# Altium PCB 002-0081 Rev -.PcbDoc
Units mil, origin at the board's own origin, x right, y up, seen from the top; angles counter-clockwise.
Board outline 2210 x 2530 mil, 4 copper layers (Top Layer, Layer 1, Layer 2, Bottom Layer), stack 23.756 mil thick; 66 components, 35 nets, 183 pads, 51 vias.
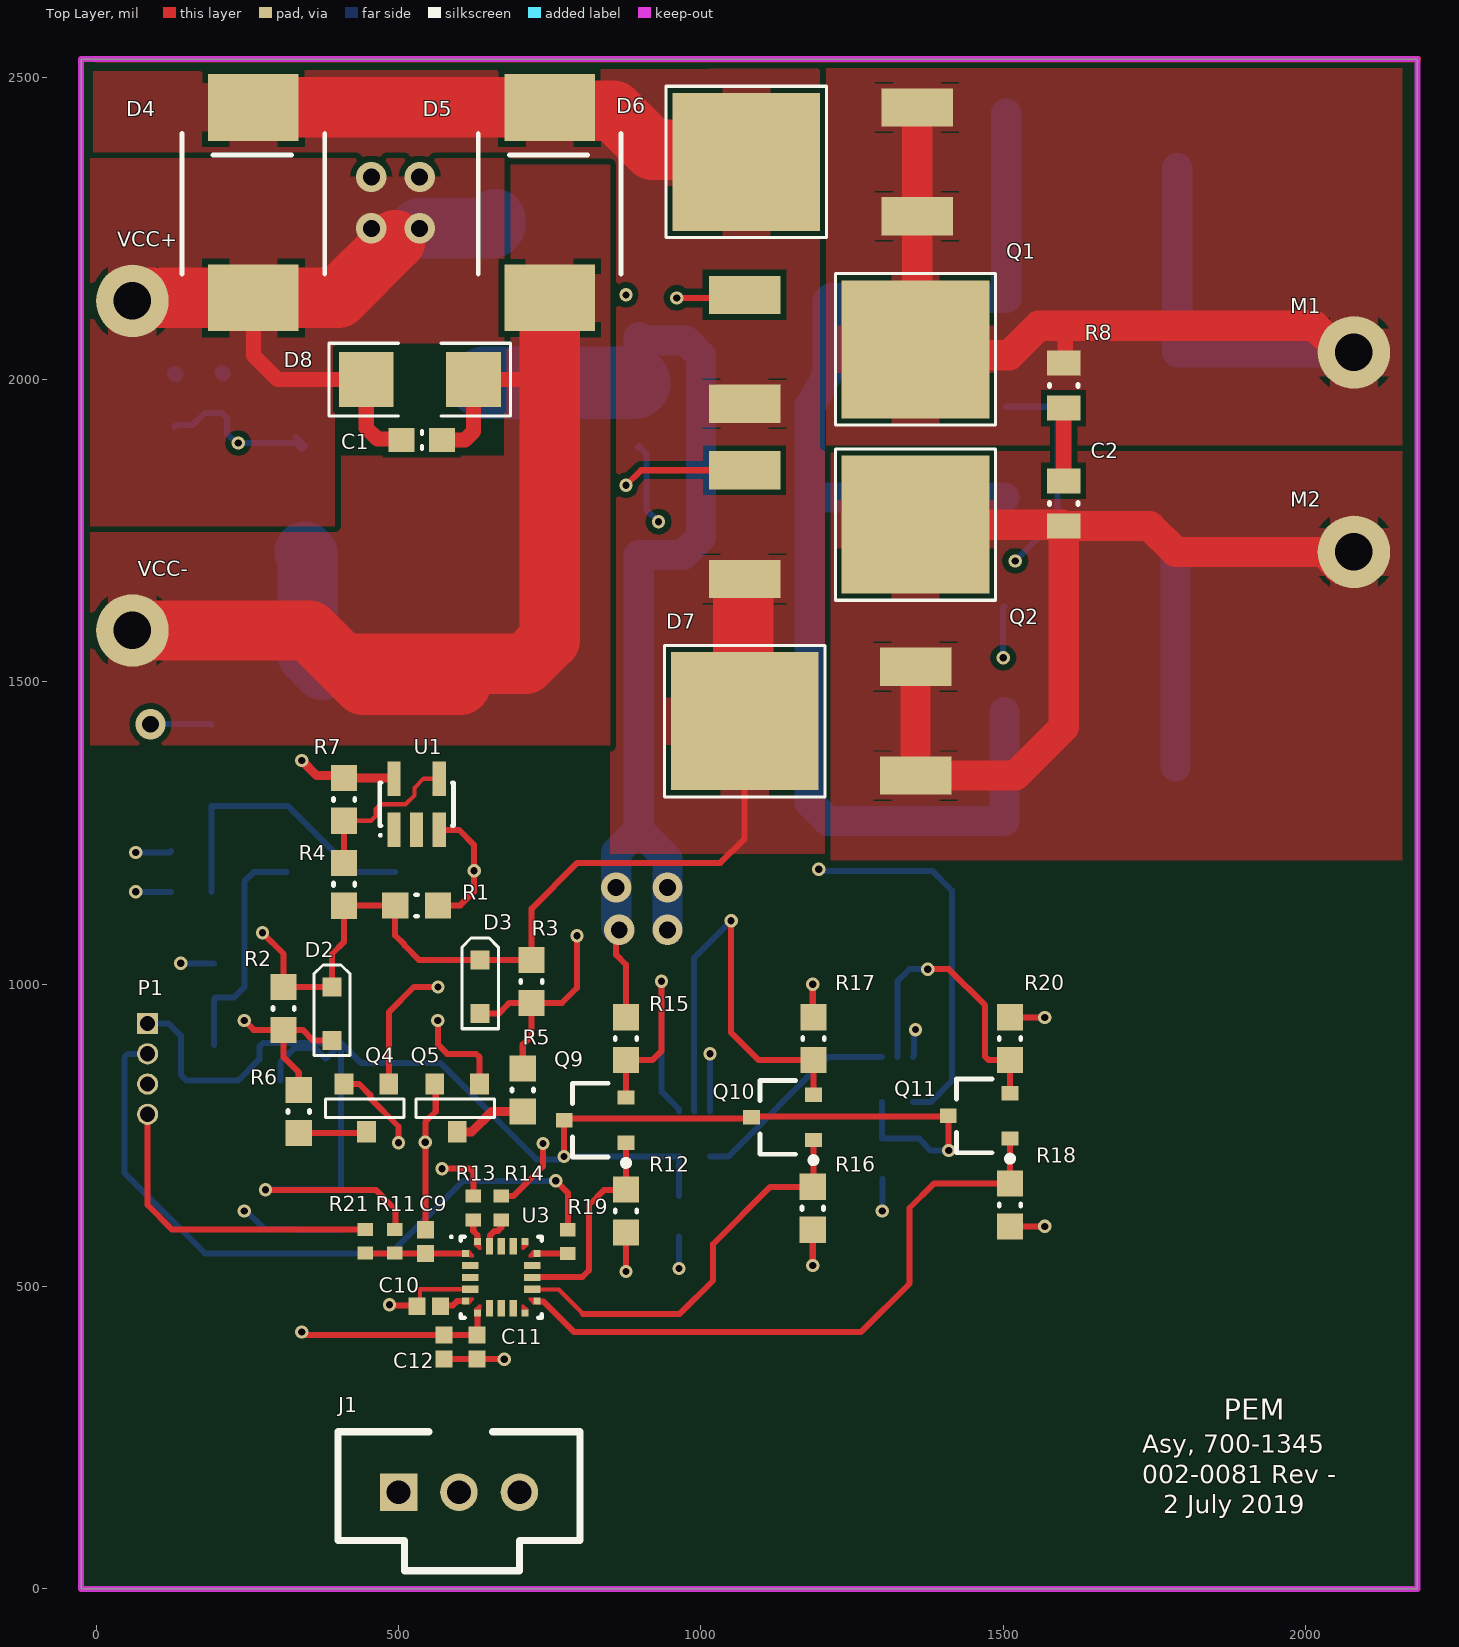
[diagram p0: Top Layer view]
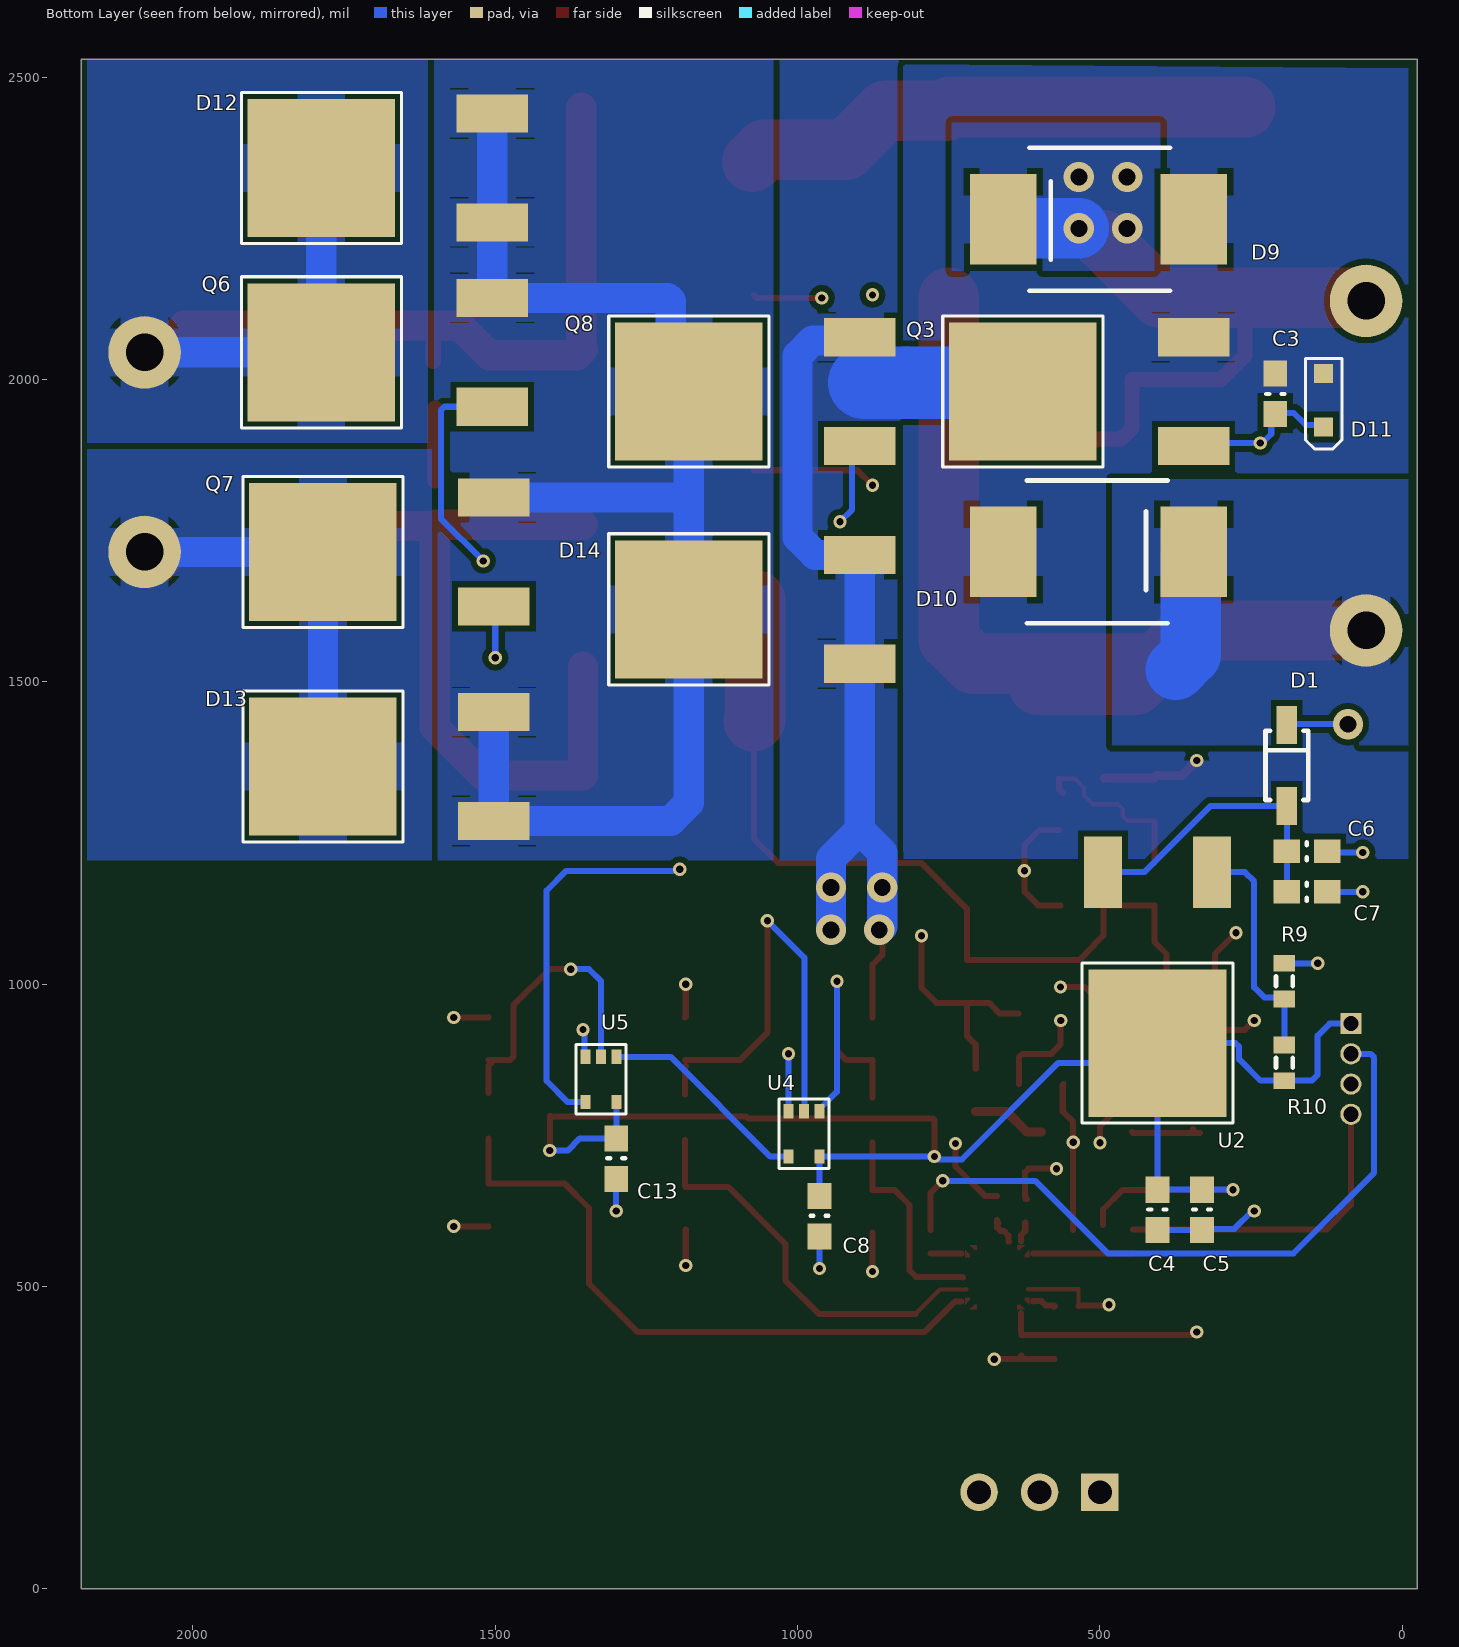
[diagram p1: Bottom Layer view, seen from below]
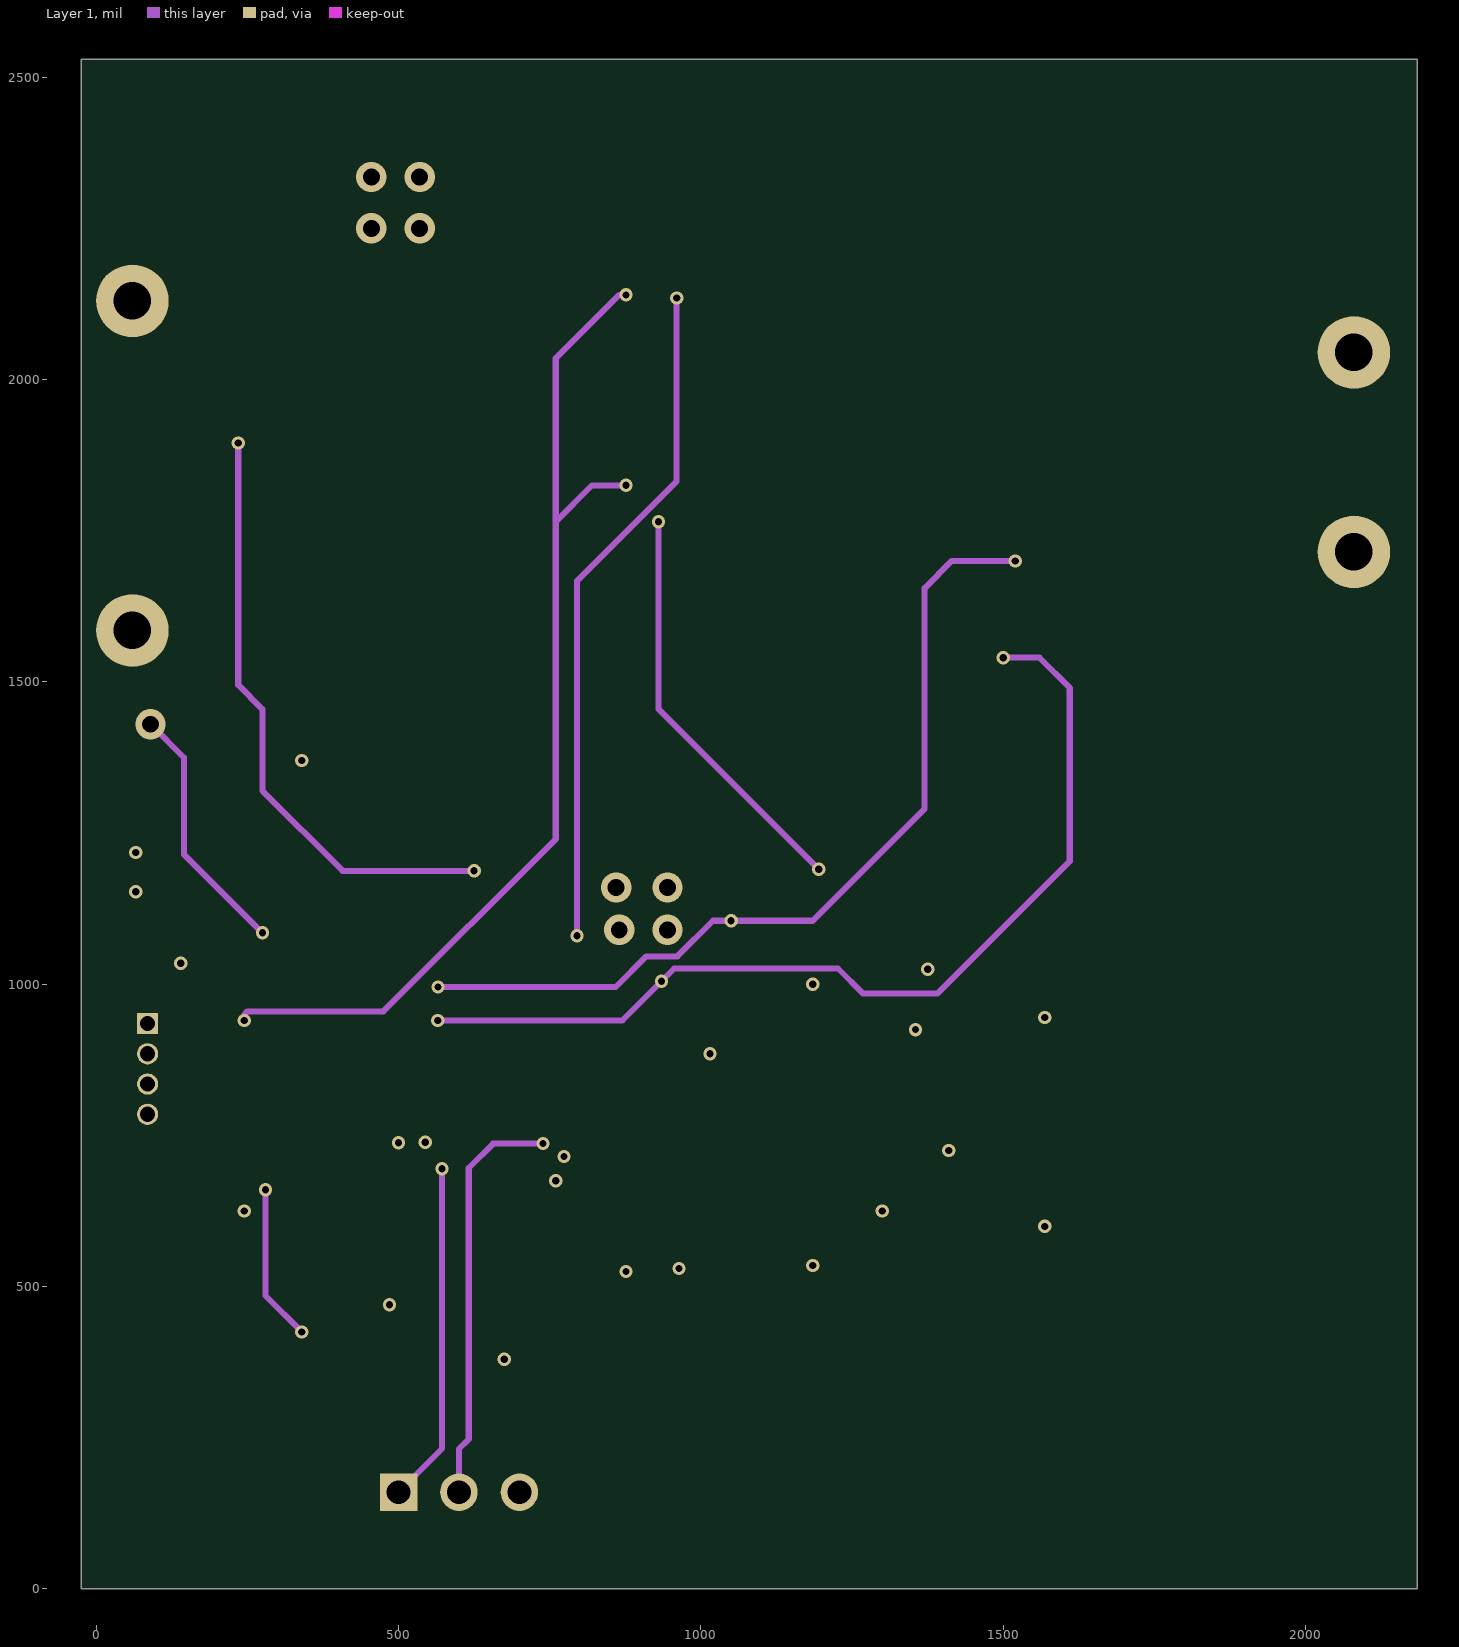
[diagram p2: Layer 1]
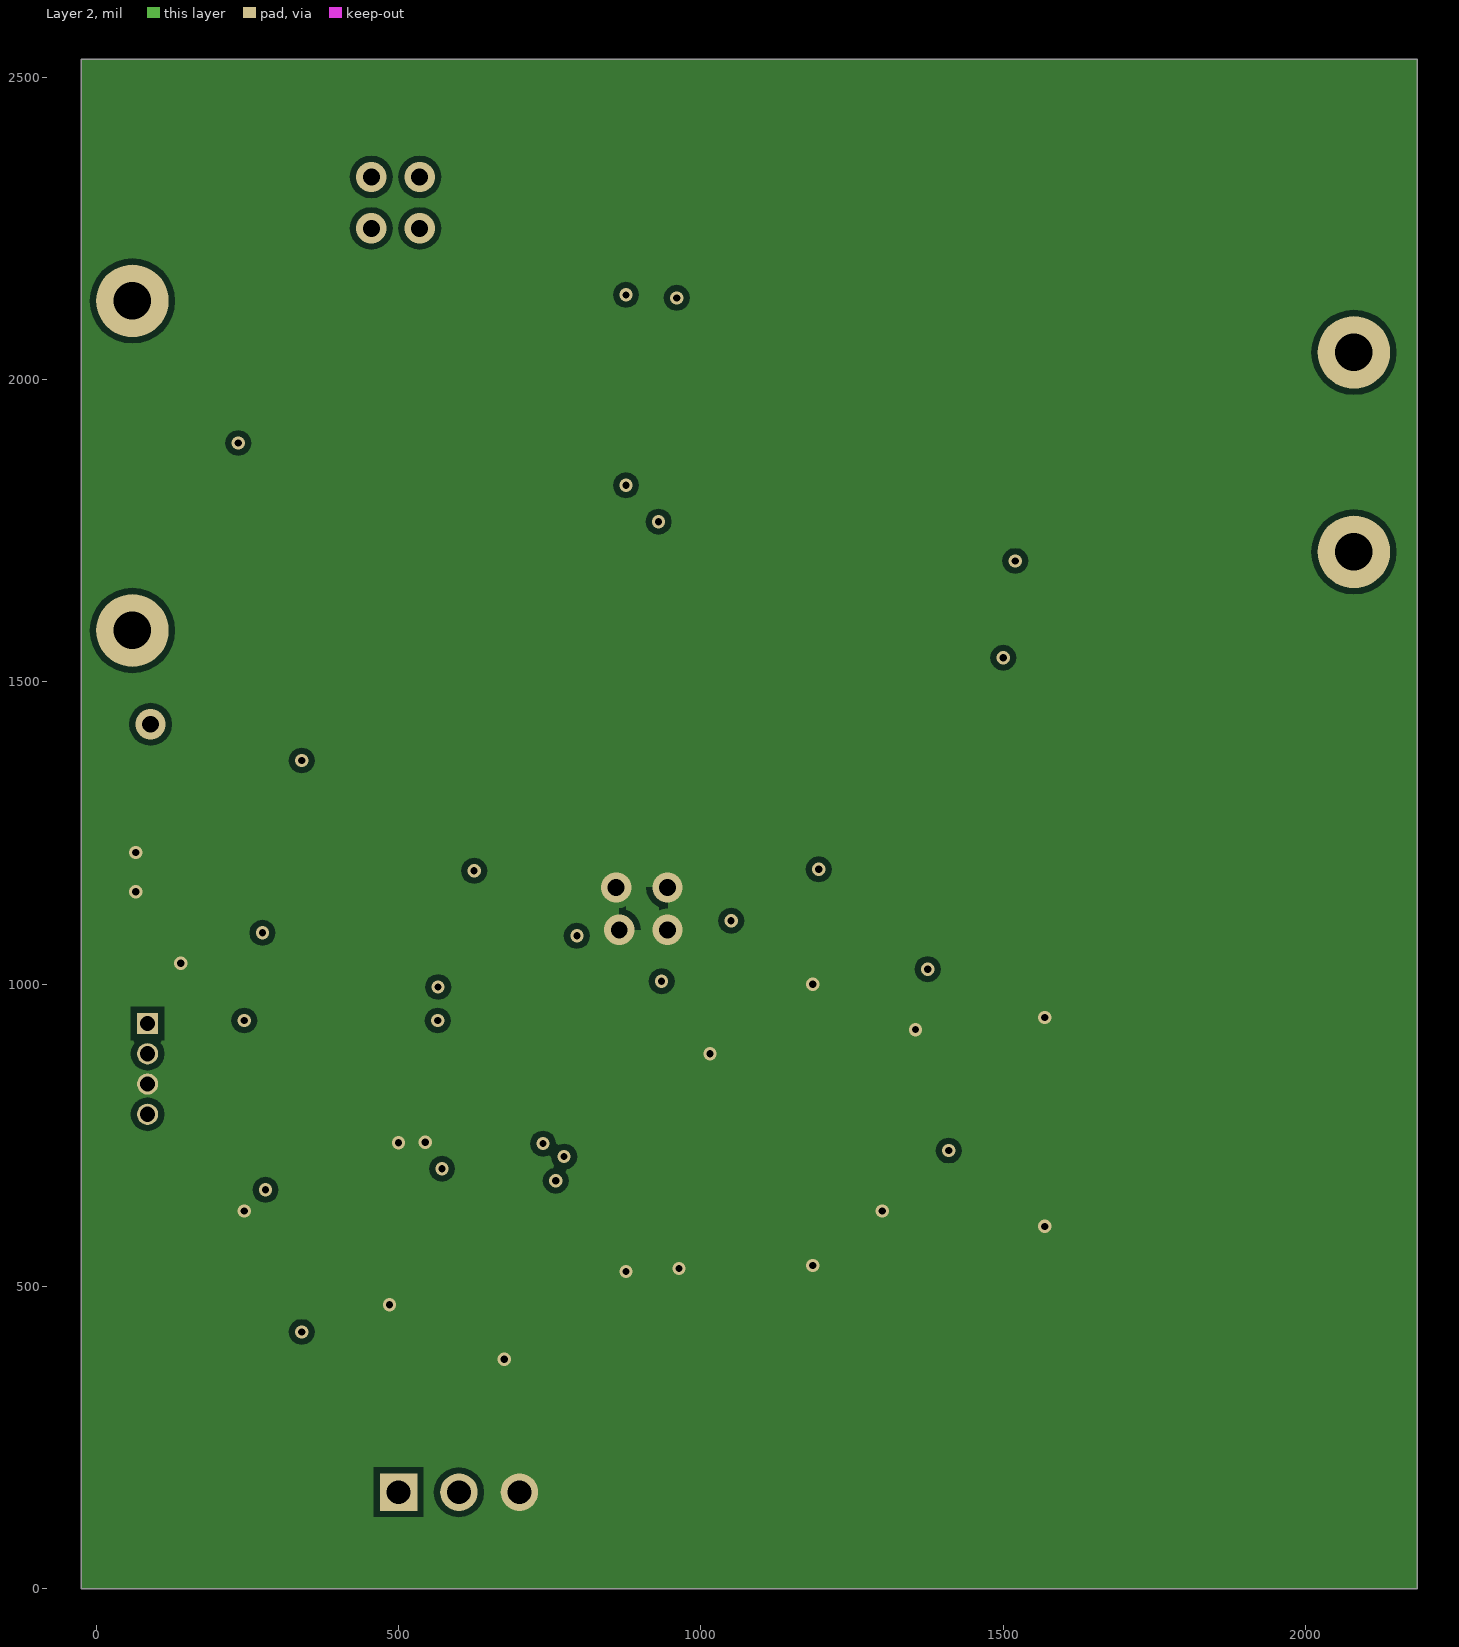
[diagram p3: Layer 2]

## Layer stack, top to bottom
Top Solder: solder mask 0.4, Solder Resist, Dk 3.5
Top Layer: signal copper 1.4
Dielectric 2: prepreg 2.8, PP-006, Dk 4.1
Layer 1: signal copper 1.3779
Dielectric 1: dielectric 12.6, FR-4, Dk 4.8
Layer 2: signal copper 1.3779
Dielectric 3: prepreg 2.8, PP-006, Dk 4.1
Bottom Layer: signal copper 1.4
Bottom Solder: solder mask 0.4, Solder Resist, Dk 3.5

## Board outline
-25,0 -25,2530 2185,2530 2185,0

## Design rules (kind name [scope] priority, off if disabled: settings)
Clearance Clearance_3 [HasFootprint('UFQFPN20_V')] p1: gap=7 ignorepadtopadclearanceinfootprint=TRUE except(0: Arc-Poly Arc-Region Track-Poly Track-Region SMDPad-Poly SMDPad-Region THPad-Poly THPad-Region Via-Poly Via-Region Fill-Poly Fill-Region Poly-Poly Poly-Region Region-Region)
Clearance Clearance_2 [HasFootprint('SOT-353')] p2: gap=10 ignorepadtopadclearanceinfootprint=TRUE except(0: Arc-Hole Track-Hole SMDPad-Hole THPad-Hole Via-Hole Fill-Hole Poly-Hole Region-Hole Text-Hole)
Clearance [All] p3: gap=10 ignorepadtopadclearanceinfootprint=FALSE except(0: Arc-Hole Track-Hole SMDPad-Hole THPad-Hole Via-Hole Fill-Hole Poly-Hole Region-Hole Text-Hole)
PolygonConnect [All] p1: connectstyle=Relief reliefconductorwidth=80 reliefentries=4 polygonreliefangle="90 Angle" airgapwidth=10
RoutingVias [All] p1: holewidth=28 width=50 viastyle="Through Hole" minholewidth=12 minwidth=22 maxholewidth=28 maxwidth=50
SilkToSolderMaskClearance [IsPad] p1: minsilkscreentomaskgap=7 clearancetoexposedcopper=TRUE
SolderMaskExpansion [All] p1: expansion=4
Width [All] p1: maxlimit=120 minlimit=7 preferedwidth=10
29 further rules are at their usual default settings.

## Classes and differential pairs
component class "002-0081 Rev -": C1 C2 C3 C4 C5 C8 C10 C13 D1 D2 D3 D6 D11 D12 D13 D14 J1 P1 Q1 Q2 Q3 Q4 Q5 Q6 Q9 R1 R2 R3 R4 R5 R6 R7 R8 R9 R10 R11 R12 R13 R14 R15 R16 R17 R18 R19 R20 R21 U1 U2 U3 U5

## Components (designator, comment, footprint, x,y, rotation, side; value= is the part's Value field where it differs from the comment)
C1 "0.01 UF, 50V" 0603 505,1900 r0 top
C2 "Cap" RESC0805(2012)_N 1600,1795 r90 top value="0.1uF 100V"
C3 "Cap" 0603 210,2010 r270 bottom value="1000pF 50V"
C4 "Cap" 0603 405,593.39 r90 bottom value="0.1uF 50V"
C5 "Cap" 0603 331.34,593.39 r90 bottom value="1uF 50V"
C6 "Cap" 0603 124.1,1220 r0 bottom value="22UF 6.3V"
C7 "Cap" 0603 124.1,1152.87 r0 bottom value="0.1uF 50V"
C8 "Cap" 0603 963.82,583.07 r90 bottom value="0.1uF, 50V"
C9 "Cap" CAPC0402(1005)60_M 544.41,574.37 r270 top value=0.1uF
C10 "Cap" CAPC0402(1005)60_M 550,467.56 r0 top value=0.68uF
C11 "Cap" CAPC0402(1005)60_M 630,400 r90 top value=0.1uF
C12 "Cap" CAPC0402(1005)60_M 575,400 r90 top value=1uF
C13 "Cap" 0603 1300,678.07 r90 bottom value="0.1uF, 50V"
D1 "MBR0540" SOD123/X.85 191.03,1361.93 r90 bottom
D2 "MM3Z8V2B" SOD-323F 390,906.85 r90 top
D3 "MM3Z8V2B" SOD-323F 635,951.42 r90 top
D4 "SK1545-TP" SMC 260,2135.04 r90 top
D5 "SK1545-TP" SMC 750,2135.04 r90 top
D6 "V20PW10-M3/I" "DPAK (TO-252-3)"#1 1357.68,2270 r90 top
D7 "V20PW10-M3/I" "DPAK (TO-252-3)"#1 1355,1345 r90 top
D8 "TVS DIODE 28VWM 45.4VC SMB" "SMB - Bidirection" 535.32,2000 r180 top
D9 "SK1545-TP" SMC 345,2265 r0 bottom
D10 "SK1545-TP" SMC 659.96,1715 r180 bottom
D11 "MM3Z8V2B" SOD-323F 130,2010 r270 bottom
D12 "V20PW10-M3/I" "DPAK (TO-252-3)"#1 1505,2260 r90 bottom
D13 "V20PW10-M3/I" "DPAK (TO-252-3)"#1 1502.32,1270 r90 bottom
D14 "V20PW10-M3/I" "DPAK (TO-252-3)"#1 897.32,1530 r90 bottom
J1 "RS232 Conn" SCON3/.10 500,160 r180 top
P1 "4 Pin Connector" "4 PIN IN-LINE" 85,935 r0 top
Q1 "AOD4189" "DPAK (TO-252-3)"#2 1072.32,2140 r270 top
Q2 "AOD4189" "DPAK (TO-252-3)"#2 1072.32,1850 r270 top
Q3 "AOD454A" "DPAK (TO-252-3)"#2 345,1890 r90 bottom
Q4 "2N7002K-7" SOT-23-3 484,835 r180 top
Q5 "2N7002K-7" SOT-23-3 634,835 r180 top
Q6 "AOD454A" "DPAK (TO-252-3)"#2 1505,1955 r90 bottom
Q7 "AOD454A" "DPAK (TO-252-3)"#2 1502.32,1625 r90 bottom
Q8 "AOD454A" "DPAK (TO-252-3)"#2 897.32,1890 r90 bottom
Q9 "SSM3K329R" SOT-23F 825,775.32 r180 top
Q10 "SSM3K329R" SOT-23F 1135,780 r180 top
Q11 "SSM3K329R" SOT-23F 1460,782.4 r180 top
R1 "Res3" RESC0603(1608)_M 530,1130.32 r180 top value=1K
R2 "Res1" RESC0603(1608)_M 310,960 r270 top value=10K
R3 "Res1" RESC0603(1608)_M 720,1004.57 r270 top value=10K
R4 "Res1" RESC0603(1608)_M 410,1165.32 r90 top value=100K
R5 "Res1" RESC0603(1608)_M 705.43,825 r90 top value=1K
R6 "Res1" RESC0603(1608)_M 335,789.57 r270 top value=1K
R7 "Res1" RESC0603(1608)_M 410,1305.75 r90 top value=3.3K
R8 "Res1" RESC0805(2012)_N 1600,1990 r90 top value="49.9 Ohm"
R9 "Res3" J1-0603 195,1005 r270 bottom value=10K
R10 "Res3" J1-0603 195,870 r270 bottom value=3.3K
R11 "Res1" RESC0402(1005)_N 494.13,575 r90 top value=1k
R12 "Res1" RESC0603(1608)_M 876.18,625 r270 top value=10K
R13 "Res1" RESC0402(1005)_N 623.58,630 r90 top value=221
R14 "Res1" RESC0402(1005)_N 670,630 r90 top value=221
R15 "Res1" RESC0603(1608)_M 876.18,910 r90 top value=10K
R16 "Res1" RESC0603(1608)_M 1185,629.57 r270 top value=10K
R17 "Res1" RESC0603(1608)_M 1186.18,910 r90 top value=10K
R18 "Res1" RESC0603(1608)_M 1511.18,635 r270 top value=10K
R19 "Res1" RESC0402(1005)_N 780,574.37 r90 top value=100
R20 "Res1" RESC0603(1608)_M 1511.18,910 r90 top value=10K
R21 "Res1" RESC0402(1005)_N 445,575 r90 top value=100
U1 "LMV431ACM5/NOPB" DBV005 492.6,1255.32 r0 top
U2 "LM317MDTXM" "DPAK (TO-252-3)"#2 315,1185.32 r0 bottom
U3 "STM8S003F3_1" UFQFPN20_V 670,515.32 r0 top
U4 "74AHC1G86SE-7" SOT-353 1015,715 r180 bottom
U5 "74AHCT1G08SE-7" SOT-353 1350.59,805.2 r180 bottom

## Footprints (in the part's own frame and the unit in brackets; to place one, negate y for a bottom-side part, rotate by r counter-clockwise, add the part's x,y. Pads: shape width x height; smd on the part's side, far side on the other; paste and mask are expansions set on the pad)
"4 PIN IN-LINE" [mil]
  rect 35x35 hole 25: 1(0,0)
  round 35 hole 25: 2(0,-50) 3(0,-100) 4(0,-150)
0603 [mm] "1.6 x .81 0603 with position tab for component rotation reference"
  rect 1.1x1 smd: 1(0,0) 2(1.7,0)
  silkscreen extent 0.86,-0.38 0.86,0.38
CAPC0402(1005)60_M [mm] "Chip Capacitor, Body 1.0x0.5mm, Height 0.6mm, IPC Low Density"
  rect 0.72x0.72 smd: 1(-0.5,0) 2(0.5,0)
  body extent -0.55,-0.3 0.55,0.3, height 0.6
DBV005 [mm]
  rect 0.55x1.45 smd: 1(0,0) 2(0.95,0) 3(1.9,0) 4(1.9,2.15) 5(0,2.15)
  silkscreen extent -0.62,-0.27 2.5,1.97
"DPAK (TO-252-3)"#1 [mm]
  rect 1.6x3 smd: 1(0,0) 1(4.572,0)
  rect 5.8x6.2 smd: 2(2.286,7.18)
  silkscreen extent -0.89,3.81 5.46,10.54
"DPAK (TO-252-3)"#2 [mm]
  rect 1.6x3 smd: 1(0,0) 3(4.572,0)
  rect 5.8x6.2 smd: 2(2.286,7.18)
  silkscreen extent -0.89,3.81 5.46,10.54
J1-0603 [mm] "Chip Resistor, Body 1.6x0.8mm, IPC High Density"
  rect 0.7x0.9 smd: 1(-0.75,0) 2(0.75,0)
  silkscreen extent -0.2,-0.35 0.2,0.35, body extent -0.85,-0.48 0.85,0.48, height 0.9
RESC0402(1005)_N [mm] "Chip Resistor, Body 1.0x0.5mm, IPC Medium Density"
  rect 0.55x0.65 smd: 1(-0.5,0) 2(0.5,0)
  body extent -0.52,-0.27 0.53,0.28, height 0.4
RESC0603(1608)_M [mm] "Chip Resistor, Body 1.6x0.8mm, IPC Low Density"
  rect 1.1x1.1 smd: 1(-0.9,0) 2(0.9,0)
  silkscreen extent -0.05,-0.45 0.05,0.45, body extent -0.85,-0.47 0.85,0.47, height 0.6
RESC0805(2012)_N [mm] "Chip Resistor, Body 2.0x1.3mm, IPC Medium Density"
  rect 1.05x1.4 smd: 1(-0.95,0) 2(0.95,0)
  silkscreen extent -0.05,-0.6 0.05,0.6, body extent -1.1,-0.67 1.1,0.68, height 0.7
SCON3/.10 [mil]
  rect 62x62 hole 39.37: 1(0,0)
  round 62 hole 39.37: 2(-100,0) 3(-200,0)
  silkscreen extent -300,-100 100,130
"SMB - Bidirection" [mm] "DO-214-AA/SMB; 2 C-Bend Leads; Body 5.3 x 3.6 mm, inc. leads (LxW)"
  rect 2.3x2.3 smd: 1(-2.25,0) 2(2.25,0)
  silkscreen extent -3.81,-1.52 3.81,1.52
SMC [mm] "SMC; Case 403 Body 6.8 x 5.8 mm (LxW)"
  rect 2.8x3.8 smd: 1(0,0) 2(8,0)
  silkscreen extent 1,-3 6.9,3
SOD123/X.85 [mm]
  rect 1.6x0.85 smd: 1(-1.7,0) 2(1.7,0)
  silkscreen extent -1.45,-0.9 1.45,0.9
SOD-323F [mm]
  rect 0.8x0.8 smd: 1(0,0) 2(2.25,0)
  silkscreen extent -0.64,-0.76 3.17,0.76
SOT-23-3 [mil]
  rect 31x35 smd: 1(0,0) 2(74,0) 3(37,79)
  silkscreen extent -25,25 105,55
SOT-23F [mm] "SOT23, 3-Leads, Body 2.90x2.40mm, Pitch 0.95mm, IPC Medium Density"
  rect 0.7x0.6 smd: 1(-1.3,0.95) 2(1.3,0) 3(-1.3,-0.95)
  silkscreen extent -1.43,-1.55 0.95,1.92, body extent -1.32,-1.55 1.32,1.55, height 0.97
SOT-353 [mm]
  rect 0.42x0.6 smd: 1(1.3,1.9) 2(0.65,1.9) 3(0,1.9) 4(0,0) 5(1.3,0)
  silkscreen extent -0.41,-0.51 1.7,2.41
UFQFPN20_V [mm] "QFN, 20-Leads, Body 3x3mm, Pitch 0.5mm, ST Recommended"
  rect 0.3x0.3 smd paste+0 mask-0.15: 1(-1.5,1) 5(-1.5,-1) 6(-1,-1.5) 10(1,-1.5) 11(1.5,-1) 15(1.5,1) 16(1,1.5) 20(-1,1.5)
  rect 0.7x0.3 smd paste+0 mask+0.06: 2(-1.3,0.5) 3(-1.3,0) 4(-1.3,-0.5) 12(1.3,-0.5) 13(1.3,0) 14(1.3,0.5)
  rect 0.3x0.7 smd paste+0 mask+0.06: 7(-0.5,-1.3) 8(0,-1.3) 9(0.5,-1.3) 17(0.5,1.3) 18(0,1.3) 19(-0.5,1.3)
  Top Layer region: 0.85,1.15 0.85,1.35 1.15,1.35 0.95,1.15
  Top Layer region: -0.85,1.15 -0.85,1.35 -1.15,1.35 -0.95,1.15
  Top Layer region: 1.15,0.85 1.35,0.85 1.35,1.15 1.15,0.95
  Top Layer region: 0.85,-1.15 0.85,-1.35 1.15,-1.35 0.95,-1.15
  Top Layer region: -1.15,-0.85 -1.35,-0.85 -1.35,-1.15 -1.15,-0.95
  Top Layer region: 1.15,-0.85 1.35,-0.85 1.35,-1.15 1.15,-0.95
  Top Layer region: -0.85,-1.15 -0.85,-1.35 -1.15,-1.35 -0.95,-1.15
  Top Layer region: -1.15,0.85 -1.35,0.85 -1.35,1.15 -1.15,0.95
  silkscreen extent -2.15,-1.7 1.7,1.75, body extent -1.55,-1.55 1.55,1.55, height 0.6

## Part data
C1: library part CAP, "Cap Cer .01uf 50V 0603 RoHS", Manufacturer="Garrett Electronics Corporation", Part Number=X7R0603HTTD103K, PEM Part Number=EE-1293
C2: "Cap Cer 0.1uF 100V 10% X7R 0805", Part Number=CL21B104KCFSFNE, PEM Part Number=EE-1659
C3: "CAP Cer, 0.1uF, 50V, 0603 X7R, 10%", Manufacturer Part Number=06035C104KAT2A, PEM Part Number=EE-1343
C4 C7: "CAP Cer, 0.1uF, 50V, 0603 X7R, 10%", Manufacturer Part Number=06035C104KAT2A, PEM Part Number=EE-1425
C5: "CAP CER 1UF 50V 10% X5R 0603", Manufacturer Part Number=06035C104KAT2A, PEM Part Number=EE-1708
C6: "CAP CER 22UF 6.3V X5R 0603", Manufacturer Part Number=06035C104KAT2A, PEM Part Number=EE-1981
C8: "CAP Cer, 0.1uF, 50V, 0603 X7R, 10%", Part Number=06035C104KAT2A, PEM Part Number=EE-1425
C9 C11: "Cap Cer 0.1uF 10V 10% X5R 0402", Manufacturer="Taiyo Yuden", Part Number=LMK105BJ104KV-F, PEM Part Number=EE-1661
C10: "Cap cer 0.68uF 6.3V 5% X6S 0402", Manufacturer="Samsung Electro-Mechanics", Part Number=CL05X684JQ5NNNC, PEM Part Number=EE-1673
C12: "Cap Cer 1uF 10V 10% X5R 0402", Manufacturer="TDK Corporation", Part Number=C1005X5R1V105M050BC, PEM Part Number=EE-1725
C13: "Cap Cer 0.1uF 10V 10% X5R 0402", Part Number=06035C104KAT2A, PEM Part Number=EE-1425
D1: library part "D Schottky", "Diode Schottky 40V 500ma SOD-123", Manufacturer Part Number=MBR0540-TP, PEM Part Number=EE-1290
D2 D3 D11: library part "D Zener", "DIODE ZENER 8.2V 200MW SOD323F", PEM Part Number=EE-1681, Manufacturer Part Number=MM3Z8V2B
D4 D5 D9 D10: library part "D Schottky", "DIODE SCHOTTKY 45V 15A DO214AB", PEM Part Number=EE-2167, Part Number=SK1545-TP, Revision="July-2002: Re-released for DXP Platform."
D6 D7 D12 D13 D14: library part "D Schottky", "DIODE SCHOTTKY 100V 20A SLIMDPAK", PEM Part Number=EE-2166, Manufacturer Part Number=V20PW10-M3/I
D8: library part "Dual Zener", "TVS DIODE 100VWM 162VC DO214AA", Manufacturer="ON Semiconductor", Part Number=SMBJ100CA, PEM Part Number=EE-1946
J1: library part "Header 3", "CONN HDR VERT 3POS .100 TIN", Manufacturer="Phoenix Contact", Part Number=70543-0037, PEM Part Number=EE-1116, LatestRevisionDate=17-Jul-2002, LatestRevisionNote="Re-released for DXP Platform.", Publisher="Altium Limited"
P1: Manufacturer="Sullins Connector Solutions", Part Number=GRPB501VWVN-RC, PEM Part Number=EE-1855
Q1 Q2: library part MOSFET-P, "MOSFET P-CH 40V 40A TO252 DPAK", PEM Part Number=EE-1879, Manufacturer Part Number=AOD4189
Q3: library part MOSFET-N, "MOSFET N-CH 250V 16A D-PAK", PEM Part Number=EE-1898, Part Number=AOD454A
Q4 Q5: library part MOSFET-N, "MOSFET N-CH 60V 0.38A SOT23-3", PEM Part Number=EE-2053, Manufacturer Part Number=2N7002K-7
Q6 Q7 Q8: library part MOSFET-N, "MOSFET N-CH 40V 20A TO252", Manufacturer="Alpha & Omega Semiconductor Inc.", PEM Part Number=EE-1898, Part Number=AOD454A
Q9 Q10: library part MOSFET-N, "N-Channel 30V 3.5A (Ta) 1W (Ta) Surface Mount SOT-23F", Manufacturer="Alpha & Omega Semiconductor Inc.", PEM Part Number=EE-1830, Part Number=SSM3K329R
Q11: library part MOSFET-N, "N-Channel 30V 3.5A (Ta) 1W (Ta) Surface Mount SOT-23F", Manufacturer="Alpha & Omega Semiconductor Inc.", Part Number=AOD454A, PEM Part Number=EE-1898
R1: "RES SMD 1K OHM 1% 1/10W 0603", PEM Part Number=EE-2066, LatestRevisionDate=29-May-2009, LatestRevisionNote="IPC-7351 Footprint Added.", PackageDescription="Chip Resistor", PackageReference=J1-0603, Published=8-Jun-2000, Publisher="Altium Limited"
R2 R3 R9 R12 R15 R16 R17 R18 R20: "Res 10K 0603 1% 1/10W RoHS", Part Number=RK73H1JTTD1002F, PEM Part Number=EE-1296
R4: "Res 100K 0603 1% 1/10W RoHS", Part Number=RK73H1JTTD1002F, PEM Part Number=EE-1295
R5 R6: "Res 1.0K 0603 1% 1/10W RoHS", Manufacturer Part Number=CRCW06031K00FKEA, PEM Part Number=EE-1297
R7: "RES 23.7K OHM 1/10W 1% 0603 SMD", Part Number=MCR03ERTF3301, PEM Part Number=EE-1730
R8: "Res 49.9R 0805 1% 1/8W", Manufacturer=Phycomp, Part Number=9C08052A49R9FKHFT, PEM Part Number=EE-1238
R10: "Res 3.3K 0603 1% 1/8W RoHS", Part Number=MCR03ERTF3301, PEM Part Number=EE-1730
R11: "Res 1K 0402 1% 1/16W RoHS", Manufacturer=Vishay, Part Number=CRCW04021K00FKED, PEM Part Number=EE-1581
R13: "RES SMD 221 OHM 1% 1/16W 0402", Part Number=RC1005F2210CS, PEM Part Number=EE-1798
R14: "Res 1K 0603 1% 1/10W RoHS", Part Number=RC1005F2210CS, PEM Part Number=EE-1798
R19 R21: "Res 100R 0402 1% 1/16W RoHs", Manufacturer=Yageo, Part Number=RC0402FR-07100RL, PEM Part Number=EE-1588
U1: library part TL431IDBVR, "IC VREF SHUNT ADJ SOT23-5", PEM Part Number=EE-1900, Part Number=LMV431ACM5/NOPB
U2: library part LM317D2T(3), "SMT, IC, Adjust Voltage Reg, 0.5A, 3TERM, TO-252, 40V diff max", Manufacturer="Fairchild Semiconductor", PEM Part Number=EE-1248, Part Number=LM317MDTXM
U3: "MCU 8BIT 8KB 16MHZ 20-UFQFPN", Manufacturer=STMicroelectronics, Part Number=STM8S003F3U6TR, PEM Part Number=EE-1655
U4: library part NC7SZ08, "IC GATE XOR 1CH 2-INP SOT353", Manufacturer="Diodes Incorporated", PEM Part Number=EE-2165, Part Number=74AHC1G86SE-7
U5: library part NC7SZ08, "IC GATE AND 1CH 2-INP SOT-353", Manufacturer="Diodes Incorporated", PEM Part Number=EE-1801, Part Number=74AHCT1G08SE-7

## Free pads (board coordinates)
  round 120 hole 62: 1(2080,2045) 13(2080,1715) 14(60,2130) 15(60,1585)

## Via types
v1: diameter 22, hole 12, Top Layer to Bottom Layer, 42 vias
v2: diameter 50, hole 28, Top Layer to Bottom Layer, 9 vias

## Nets (pads, with @x,y where several pads share a name; then routed paths per layer and width w, separated by ;. In a path a pad name is that pad's centre, name@x,y a point inside that pad or via, vN(x,y) a via of type N, cw(c..) or ccw(c..) an arc to the next point about the centre after c; other vN are vias at no path point)
5V: C4.2 C5.2 C8.2 C11.2 C12.2 C13.2 P1.1 Q9.2 Q10.2 Q11.2 R10.2 R11.2 U2.2 U3.6 U4.5 U5.5 | length 3439.1
  Top Layer w10: v1(280,660) 462.51,660 495,627.51 R11.2@495,601.57 ; v1(340,425) 345.31,419.69 C12.2 C11.2 ; C11.2@630.32,425.32 630.32,455.95 U3.6 ; v1(773.82,715) Q9.2 776.16,777.66 1081.48,777.66 Q10.2 1085.02,781.2 1407.62,781.2 Q11.2 1409.41,781.81 1409.41,725.59 v1(1410,725)
  Layer 1 w10: v1(280,660) 280,485 v1(340,425)
  Bottom Layer w10: P1.1 120,935 140,915 140,850 149.53,840.47 R10.2 234.53,840.47 270,875.94 270,896.78 275.86,902.64 U2.2 ; v1(280,660) 290,660 290.32,660.32 C5.2 C4.2 U2.2 ; U2.2@305,840.47 305,871.57 328.43,895 361.57,895 379.47,877.1 U2.2 ; C8.2 U4.5 v1(773.82,715) 769.35,710.53 728.16,710.53 568.7,870 437.64,870 U2.2 ; U5.5 1299.41,745.59 C13.2 1360,745 1380,725 v1(1410,725)
12-24V: C6.2 C7.2 D1.1 U2.3 | length 491.5
  Bottom Layer w10: C7.2 C6.2 D1.1 317.08,1295 426.76,1185.32 U2.3
CCW_MCU: Q10.1 R16.1 U3.12 | length 680.9
  Top Layer w7: U3.12 721.81,495 765,495 805,455
  Top Layer w10: 805,455 965,455 1020,510 1020,570 1115,665 R16.1 1186.18,666.18 Q10.1
CCW_MOT: Q4.1 Q6.1 Q10.3 R17.1 U4.2 | length 2771.7
  Top Layer w10: Q4.1 484,954 525.43,995.43 v1(565.43,995.43) ; v1(1050,1105) 1050,920 1095,875 1185.75,875 R17.1 ; R17.1@1185,864.57 1186.18,863.39 Q10.3
  Layer 1 w10: v1(565.43,995.43) 859.18,995.43 909.74,1046 961,1046 1020,1105 v1(1050,1105) 1185,1105 1370,1290 1370,1655 1415,1700 v1(1520,1700)
  Bottom Layer w10: U4.2 989,790.21 989,1044 v1(1050,1105) ; Q6.1 1584.14,1955 1590,1949.14 1590,1770 v1(1520,1700)
CW_MCU: Q9.1 R12.1 U3.13 | length 350.6
  Top Layer w10: U3.13@726.4,515.32 727.31,516.22 804.19,516.22 815,527.03 815,635 840,660 875.75,660 R12.1 Q9.1
CW_MOT: Q5.1 Q7.1 Q9.3 R15.1 U4.1 | length 2322
  Top Layer w10: v1(565,940) 565,900.43 580.43,885 628.14,885 634,879.14 Q5.1 ; Q9.3 R15.1 919.57,874.57 935,890 v1(935,1005)
  Layer 1 w10: v1(565,940) 870,940 956,1026 1226.76,1026 1267.76,985 1391.57,985 1610,1203.43 1610,1490 1560,1540 v1(1500,1540)
  Bottom Layer w10: v1(935,1005) 935,822.17 963.82,793.35 U4.1 ; v1(1500,1540) 1500,1622.68 Q7.1
ENABLE: U4.4 U5.1 | length 352.8
  Bottom Layer w10: U4.4 1045,715 1210,880 U5.1
GND: C4.1 C5.1 C6.1 C7.1 C8.1 C9.1 C10.1 C11.1 C12.1 C13.1 D14.1 J1.3 P1.3 Q3.2 Q4.2 Q5.2 Q8.3 R9.1 R12.2 R15.2 R16.2 R17.2 R18.2 R20.2 U3.4 U4.3 U5.3 | length 3431
  Top Layer w7: C10.1@535.32,467.56 535.32,495.63 U3.4
  Top Layer w10: Q4.2 435,835 453.5,816.5 453.5,811.29 500,764.79 v1(500,737.91) ; v1(485,470) 486.22,468.78 534.09,468.78 C10.1@535.32,467.56 ; C9.1 v1(544.41,738.57) 544.41,772.4 561.57,789.57 561.57,833.43 Q5.2 ; C12.1 C11.1 C11.1@635.32,380.32 ; C11.1@629.84,385.47 630,385.63 C11.1@635.32,380.32 ; v1(675,380) 675,380.32 C11.1@635.32,380.32 ; v2@860,1090 860,1048.5 876.18,1032.32 R15.2 ; v1(876.18,525) R12.2 ; v1(1185,535) R16.2 ; v1(1185,1000) 1185,946.61 R17.2 ; R18.2 v1(1568.5,599.57) ; R20.2 1511.61,945 v1(1568.5,945)
  Bottom Layer w10: v1(65.43,1152.87) C7.1 ; v1(65.43,1218) 122.1,1218 C6.1 ; P1.3 P1.3@85.33,834.67 ; v1(140,1034.53) R9.1 ; v1(245,625) 248.25,625 277.89,595.35 331.34,595.35 C5.1 C4.1 ; v1(963.82,530) C8.1 ; U4.3 v1(1015,885) ; v1(1300,625) C13.1 ; U5.3 1352.8,882.2 1352.8,922.8 v1(1355,925)
  Bottom Layer w50: Q3.2 627.68,2005 639.22,1997.31 Q3.2@642.68,1995 ; v2(865,1090) 860,1095 v2(860,1160) 860,1218 897.32,1255.32 ; 890,1995 897.32,2002.32 Q8.3 902.66,2064.66 975,2064.66 1000,2039.66 1000,1739.29 970.71,1710 897.32,1710 897.32,1530 897.32,1255.32 ; v2(945,1090) v2(945,1160) 945,1207.65 897.32,1255.32
  Bottom Layer w120: Q3.2@642.68,1995 890,1995
GND2: C3.1 D9.1 D10.1 D11.1 Q3.3 R7.2 U1.5 | length 169.4
  Top Layer w15: v1(340.04,1370) 365,1345 406.18,1345 R7.2 491.38,1341.18 U1.5
  Bottom Layer w25: D11.1 D11.1@131.54,2008.46 ; C3.1@208.46,2011.54 C3.1
M1: D6.1 D12.2 pad.1 Q1.2 Q6.2 R8.2 | length 1820
  Top Layer w25: R8.2@1602.56,2029.96 1602.56,2088.82
  Top Layer w50: D6.1@1357.68,2450 1357.68,2270 1357.68,2052.68 Q1.2 1365,2040 1510,2040 1558.82,2088.82 1602.56,2088.82 2014.61,2088.82 2045.03,2058.39 2047.66,2058.39 2069.21,2036.85 pad.1@2069.21,2034.21
  Bottom Layer w50: D12.2 Q6.2 pad.1
M2: C2.1 D7.1 D13.2 pad.13 Q2.2 Q7.2 | length 2170.2
  Top Layer w50: D7.1@1355,1525 1355,1345 1520,1345 1600,1425 C2.1 ; Q2.2 1597.6,1760 C2.1 ; pad.13@2053.45,1688.45 2053.45,1690.74 2029.19,1715 1785,1715 1742.4,1757.6 C2.1
  Bottom Layer w50: D13.2 Q7.2 pad.13
NetC2_2: C2.2 R8.1 | length 120.2
  Top Layer w25: C2.2 R8.1
NetC3_2: C3.2 D11.2 Q3.1 R1.1 U1.3 | length 1498.7
  Top Layer w10: R1.1 602.17,1130.31 624.72,1152.87 624.72,1230.59 600,1255.32 U1.3
  Layer 1 w10: v1(235,1895) 235,1495 275,1455 275,1320 407.5,1187.5 v1(625,1187.5)
  Bottom Layer w10: D11.2 133.58,1925 160,1925 180,1945 208.07,1945 C3.2 216.75,1936.32 216.75,1910 231.75,1895 v1(235,1895) 329.98,1895 339.99,1884.99 Q3.1 Q3.1@330,1905
NetC10_2: C10.2 U3.5 | length 42.7
  Top Layer w10: C10.2@575.91,466.34 574.69,467.56 576.07,468.94 590,468.94 597,475.94 U3.5 U3.5@610.04,475.04
NetD2_1: D2.1 Q2.1 R2.2 R6.1 | length 2216
  Top Layer w10: v1(245,940) 260.43,924.57 R2.2 ; R6.1 335,854.14 310,879.14 R2.2 ; D2.1 359.25,906.85 341.54,924.57 R2.2 ; v1(876.18,1825) 901.18,1850 Q2.1
  Layer 1 w10: v1(245,940) 245,950 250,955 475,955 760,1240 760,1765 ; v1(876.18,1825) 820,1825 760,1765 ; v1(876.18,2140) 865,2140 760,2035 760,1765
NetD3_1: D3.1 Q1.1 R3.2 R5.2 | length 1616.3
  Top Layer w10: D3.1 665.75,951.42 680,965.67 680,965.79 683.35,969.13 R3.2 ; R5.2 705.43,900 720,914.57 R3.2 ; v1(795,1080) 795,993.76 770.38,969.13 R3.2 ; v1(960,2135) 1067.32,2135 Q1.1
  Layer 1 w10: v1(795,1080) 795,1666.77 960,1831.77 v1(960,2135)
NetD12_1: D12.1 D13.1 D14.2 Q6.3 Q7.3 Q8.2 | length 2277.3
  Bottom Layer w50: D13.1@1502.32,1450 1502.32,1270 1210,1270 1180,1300 D14.2 1180,1805 ; Q7.3 1180,1805 ; D12.1@1505,2440 1505,2260 Q6.3 1215,2135 1210,2130 1210,2010 1190.98,1974.17 1184,1961.02 1180,1957.02 1180,1805
NetP1_2: P1.2 R19.2 | length 1139.1
  Top Layer w10: v1(760,675) 780,655 R19.2
  Bottom Layer w10: P1.2 52.5,885 46.64,879.14 46.64,688.36 180,555 486.93,555 606.93,675 v1(760,675)
NetP1_4: P1.4 R21.2 | length 526.7
  Top Layer w10: P1.4 85,635 125.31,594.69 R21.2
NetQ4_3: Q4.3 R6.2 | length 114.1
  Top Layer w10: R6.2 445.13,754.13 Q4.3 ; R6.2@345,759.57 R6.2@345.95,760.51
NetQ5_3: Q5.3 R5.1 | length 122.3
  Top Layer w15: Q5.3 621.04,756 654.6,789.57 R5.1
NetR4_2: R4.2 R7.1 U1.4 | length 296.1
  Top Layer w7: R7.1 454.68,1270.32 462.34,1277.97 462.34,1289.98 470,1297.64 511.74,1297.64 526.44,1312.34 526.44,1324.82 541.57,1339.96 U1.4
  Top Layer w10: R4.2 R7.1 ; U1.4@561.57,1316.42 567.4,1322.24 U1.4
NetR9_2: R9.2 R10.1 U2.1 | length 385.4
  Bottom Layer w10: R10.1 R9.2 197.24,977.72 227.72,977.72 245,995 245,1170 260.32,1185.32 U2.1
NetR13_1: R13.1 U3.20 | length 35.3
  Top Layer w10: R13.1@623.58,605.63 622.82,605.63 623.58,604.87 623.58,592.05 630.63,585 U3.20
NetR14_1: R14.1 U3.19 | length 48.9
  Top Layer w10: U3.19@650.63,574.37 651.22,574.96 651.22,584.37 659.12,592.28 664.14,592.28 670,598.13 R14.1 ; R14.1@668.03,605.32 R14.1@670,605.32
PWM_MCU: Q11.1 R18.1 U3.11 | length 1052.8
  Top Layer w10: U3.11@729.06,475.63 739.37,475.63 790.31,424.69 1264.69,424.69 1345,505 1345,630 1385.43,670.43 R18.1 Q11.1
PWM_MOT: Q11.3 R20.1 U5.2 | length 482.5
  Top Layer w10: v1(1375,1025) 1410,1025 1470,965 1470,880.42 1475.86,874.57 R20.1 R20.1@1506.61,870 ; Q11.3 R20.1@1511.18,864.57
  Bottom Layer w10: U5.2 1325,1005 1345,1025 v1(1375,1025)
PWM_MOT_IN: Q8.1 U5.4 | length 1453.9
  Layer 1 w10: v1(930,1765) 930,1455 v1(1195,1190)
  Bottom Layer w10: Q8.1@895,1887.68 Q8.1 910,1877.32 910,1785 v1(930,1765) ; v1@1195,1187.5 1382.5,1187.5 1415,1155 1415,840 1380.2,805.2 U5.4
RESET: C9.2 R11.1 R21.1 U3.1 | length 166.2
  Top Layer w10: R21.1 445.31,555 502.2,555 502.51,554.69 C9.2 574.69,554.68 U3.1
RX: J1.1 R13.2 | length 679
  Top Layer w10: 590.16,695 v1(571.93,695) 618.04,695 623.9,689.14 623.9,650 R13.2 ; R13.2@620.85,645 R13.2@622.82,645
  Layer 1 w10: J1.1 571.93,231.93 v1(571.93,695)
SWIM: R19.1 U3.15 | length 50.9
  Top Layer w10: U3.15 R19.1
TX: J1.2 R14.2 | length 809.4
  Top Layer w10: R14.2 689.96,649.69 738.93,698.66 v1(738.93,736.53)
  Layer 1 w10: J1.2 600,231.72 616.16,247.87 616.16,696.16 656.53,736.53 v1(738.93,736.53)
VCC: D1.2 D2.2 D3.2 D4.2 D5.2 D6.2 D7.2 Q1.3 Q2.3 R1.2 R2.1 R3.1 R4.1 | length 2959.2
  Top Layer w10: v1(275,1085) 310,1050 R2.1 D2.2 390,1050 410,1070 R4.1 494.13,1129.88 494.13,1080.87 510,1065 510,1064.06 534.06,1040 D3.2 R3.1 720,1125 795.75,1200.75 1032.32,1200.75 1072.32,1240.75 D7.2
  Top Layer w100: D4.2 D5.2 755.12,2444.88 855.12,2444.88 920,2380 1055,2380 D6.2 ; 1070,1635 1070,1437.32 D7.2
  Layer 1 w10: v2(90,1430) 145,1375 145,1215 v1(275,1085)
  Bottom Layer w10: v2(90,1430) 189.89,1430 D1.2
VCC+: C1.1 D4.1 D8.2 D9.2 pad.14 | length 1058.1
  Top Layer w25: D4.1 260,2040 300,2000 D8.2 446.73,1920 465,1901.73 503.27,1901.73 C1.1
  Top Layer w100: pad.14 65.04,2135.04 D4.1 400.04,2135.04 494.57,2229.57 494.57,2230
  Bottom Layer w100: v2(535,2250) 654.84,2250 659.96,2255.12 D9.2
  other v2: 455,2250 455,2335 535,2335
VCC-: C1.2 D5.1 D8.1 D10.2 pad.15 | length 1976.7
  Top Layer w25: C1.2 610,1900 623.9,1913.9 D8.1 730,2000 750,2020
  Top Layer w100: pad.15 352,1585 442,1495 602.17,1495 ; 420,1530 710,1530 750,1570 750,2020 D5.1
  Bottom Layer w100: D10.2 350.12,1709.88 350.12,1544.88 375,1520
pads on no net: U1.1 U1.2 U3.2 U3.3 U3.7 U3.8 U3.9 U3.10 U3.14 U3.16 U3.17 U3.18

## Polygon pours and split planes (outlines as drawn)
GND2 on Bottom Layer "GND2_L04_P222" (solid, remove dead copper, pour order 222): -10,2515 -10,1207.65 825,1207.65 825,2521.45
VCC- on Bottom Layer "VCC-_L04_P218" (solid, remove dead copper, pour order 218): -10,1835 -10,1395 480,1395 480,1835
GND on Bottom Layer "GND_L04_P230" (solid, remove dead copper, pour order 230): 814.8,2530 814.8,1205 1040,1205 1040,2530
no net on Bottom Layer "NONET_L04_P220" (solid, remove dead copper, pour order 220): -10,2515
no net on Bottom Layer "NONET_L04_P198" (solid, remove dead copper, pour order 198): 730,1605
no net on Bottom Layer "NONET_L04_P196" (solid, remove dead copper, pour order 196): 730,1605
no net on Bottom Layer "NONET_L04_P194" (solid, remove dead copper, pour order 194): 760,1595
VCC+ on Bottom Layer "VCC+_L04_P190" (solid, remove dead copper, pour order 190): 400,2425 400,2180 745,2180 745,2425
NetD12_1 on Bottom Layer "NETD12_1_L04_P134" (solid, remove dead copper, pour order 134): 1611.33,2530 1611.33,1205 1040,1205 1040,2530
M1 on Bottom Layer "M1_L04_P132" (solid, remove dead copper, pour order 132): 2175,2530 2175,1885 1611.33,1885 1611.33,2530
M2 on Bottom Layer "M2_L04_P110" (solid, remove dead copper, pour order 110): 2175,1885 2175,1205 1605,1205 1605,1885
no net on Bottom Layer "Bottom Layer-No Net 2" (solid, pour order 52): 305,2395
no net on Bottom Layer "Bottom Layer-No Net 3" (solid, pour order 50): 315,2385
no net on Bottom Layer "Bottom Layer-No Net 4" (solid, pour order 46): 280,2375
no net on Bottom Layer "Bottom Layer-No Net" (solid, pour order 30): 870,1065
VCC- on Top Layer "VCC-_L01_P216" (solid, remove dead copper, pour order 216): -9.71,1873.59 -9.71,1395 850,1395 850,2354.8 675,2354.8 675,1873.59
VCC on Top Layer "VCC_L01_P228" (solid, remove dead copper, pour order 228): -5.02,2510 -5.02,2365.57 850,2365.57 850,1216.04 1215,1216.04 1215,2514.71 1207.05,2514.71
no net on Top Layer "NONET_L01_P226" (solid, remove dead copper, pour order 226): -5.02,2510
VCC+ on Top Layer "VCC+_L01_P186" (solid, remove dead copper, pour order 186): -9.71,2365.57 675,2365.57 675,2060 394.71,2060 394.71,1757.6 -9.71,1757.6
no net on Top Layer "Top Layer-No Net" (none, pour order 0): 0,2524.98 cw(c0,2530) 0,2535.02 2185,2535.02 cw(c2185,2530) 2190.01,2530 cw(c2185,2530) 2185,2524.98
no net on Top Layer "NONET_L01_P162" (solid, remove dead copper, pour order 162): 825,2315
no net on Top Layer "NONET_L01_P146" (solid, remove dead copper, pour order 146): 20,2320
M2 on Top Layer "M2_L01_P126" (solid, remove dead copper, pour order 126): 2160,1884.17 2160,1205 1215,1205 1215,1880.54 1180,1880.54
M1 on Top Layer "M1_L01_P124" (solid, remove dead copper, pour order 124): 1207.05,2514.71 2160,2514.71 2160,1891.5 1207.05,1891.5
no net on Top Layer "NONET_L01_P102" (solid, remove dead copper, pour order 102): 1675,1200
GND on Layer 2 "GND_L03_P232" (solid, remove dead copper, pour order 232): -25,0 -25,2530 2185,2530 2185,0

## Keep-outs
Top Layer:
  the board outline again, w10

## Other copper
Top Layer:
  text "Top Layer" at 2460,1145 h35
Layer 1:
  text "Signal Layer 1" at 2455,1370 h35
Layer 2:
  text "'.Layer_Name'" at 2460,1255 h35
Bottom Layer:
  text "Bottom Layer" at 2465,1034.53 h35

## Silkscreen, mask and mechanical layers (free items; w line width, h text height)
Top Overlay:
  text "VCC+" at 35,2220 h25
  text "Top Overlay" at 2435,2135 h35
  text "M1" at 1975,2110 h25
  text "M2" at 1975,1790 h25
  text "VCC-" at 69,1675 h25
  text "PEM" at 1865,280 h35
  text "Asy, 700-1345" at 1730,225 h30
  text "002-0081 Rev -" at 1730,175 h30
  text "2 July 2019" at 1765,125 h30
Top Paste:
  text "Top Paste" at 2440,2000 h35
Bottom Paste:
  text "Bottom Paste" at 2445,1760 h35
Top Solder:
  text "Top Solder" at 2445,1895 h35
Bottom Solder:
  text "Bottom Solder" at 2450,1620 h35
Mechanical 1:
  text "PCB #002-0081 Rev -" at 2425,2420 h35
  text "2 July 2019" at 2425,2310 h35
Mechanical 2:
  the board outline again, w10
  text "Board Outline" at 2450,1495 h35
Drill Drawing:
  text ".Legend" at 2440,260 h60

## Dimensions
-25,0 to -25,2530 on Drill Drawing
-25,0 to 2185,0 on Drill Drawing